# Altium PCB ui_layout-v1.2.PcbDoc
Units mil, origin at the board's own origin, x right, y up, seen from the top; angles counter-clockwise.
Board outline 3110.07 x 2131 mil, 4 copper layers (L1_Signal, L2_PWR, L3_GND, L4_Signal), stack 61.811 mil thick; 83 components, 76 nets, 296 pads, 689 vias.
Unrouted connection lines stored in the file: 90.
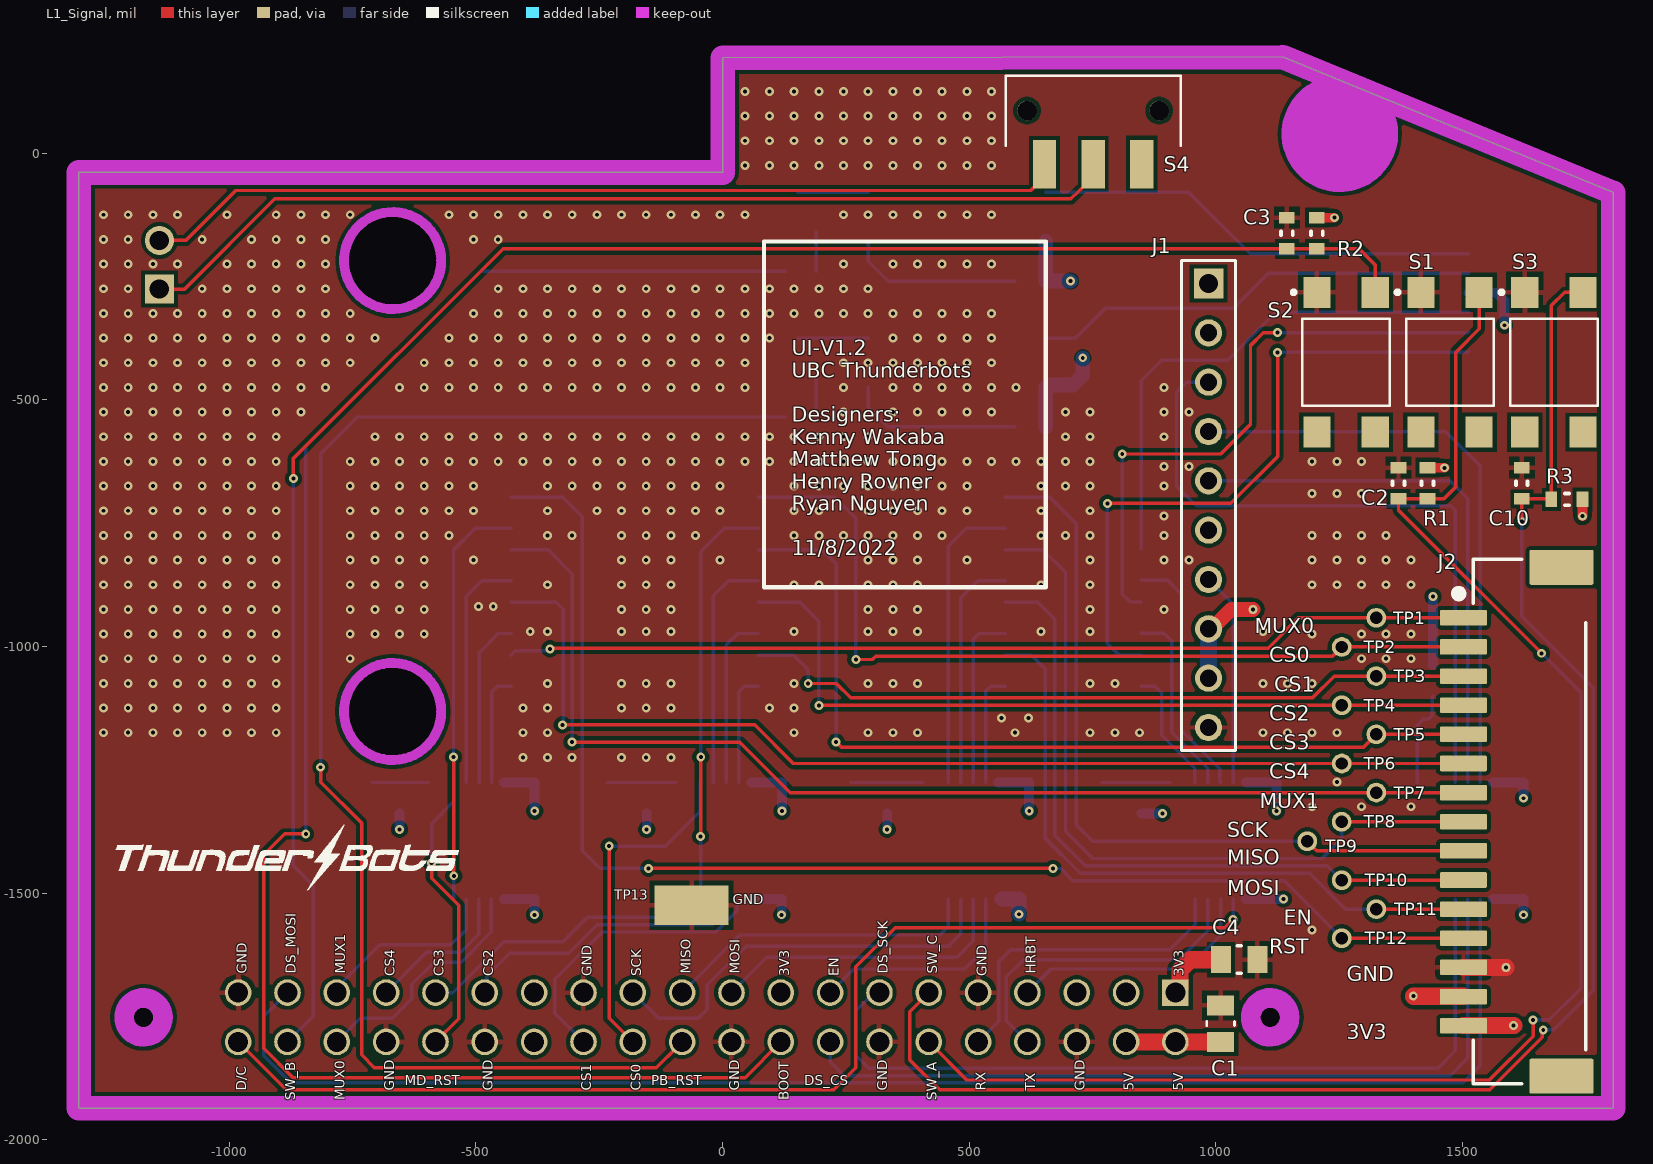
[diagram p0: L1_Signal view]
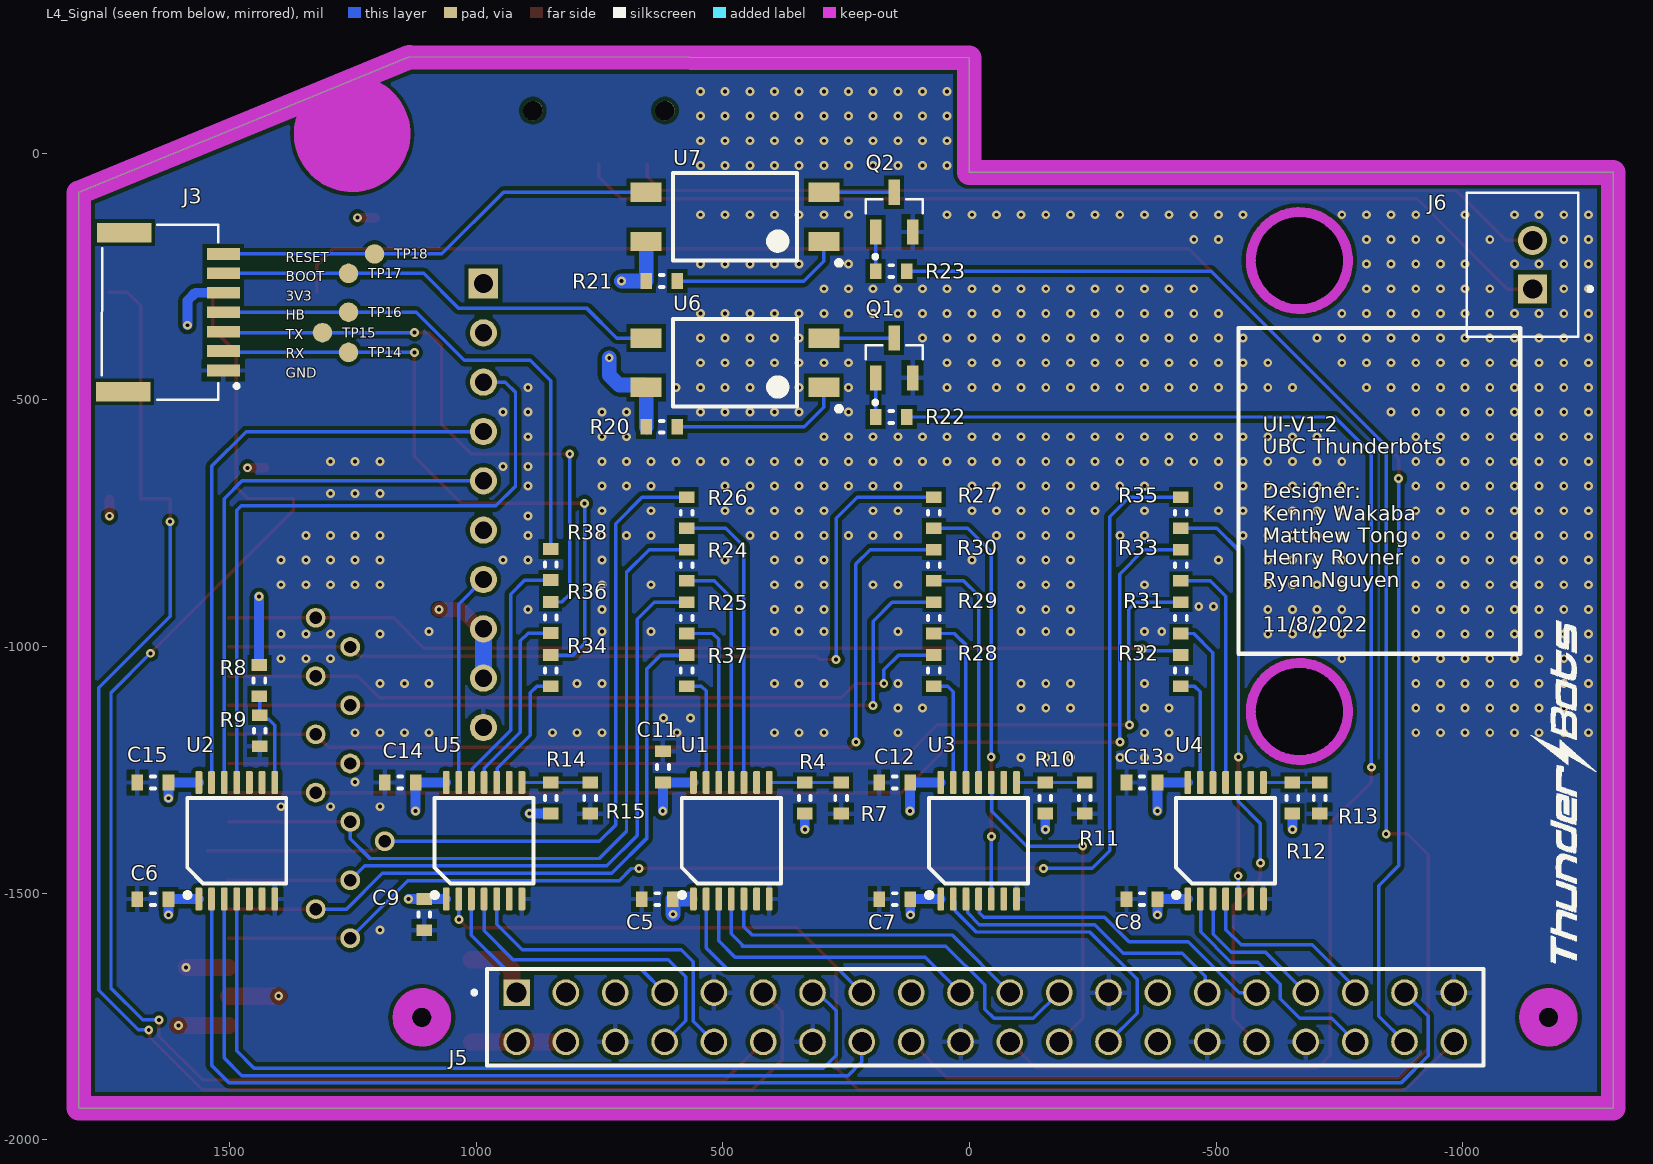
[diagram p1: L4_Signal view, seen from below]
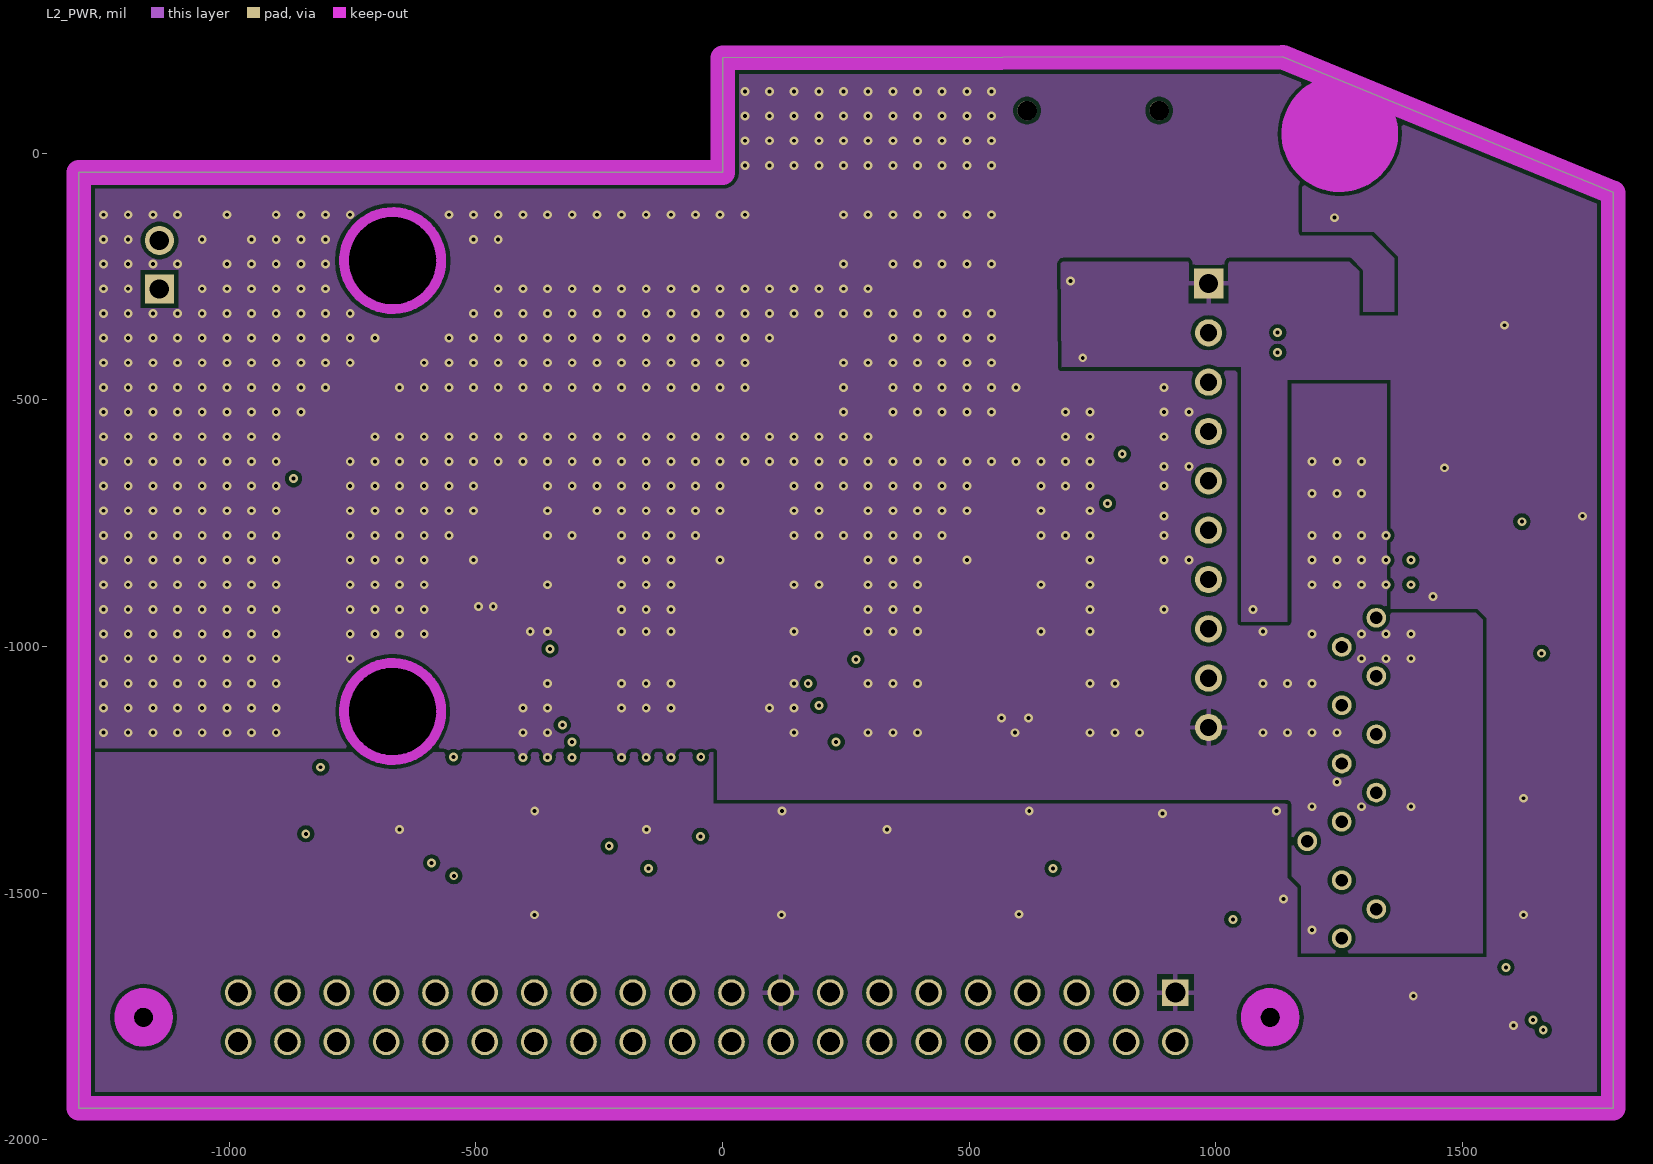
[diagram p2: L2_PWR]
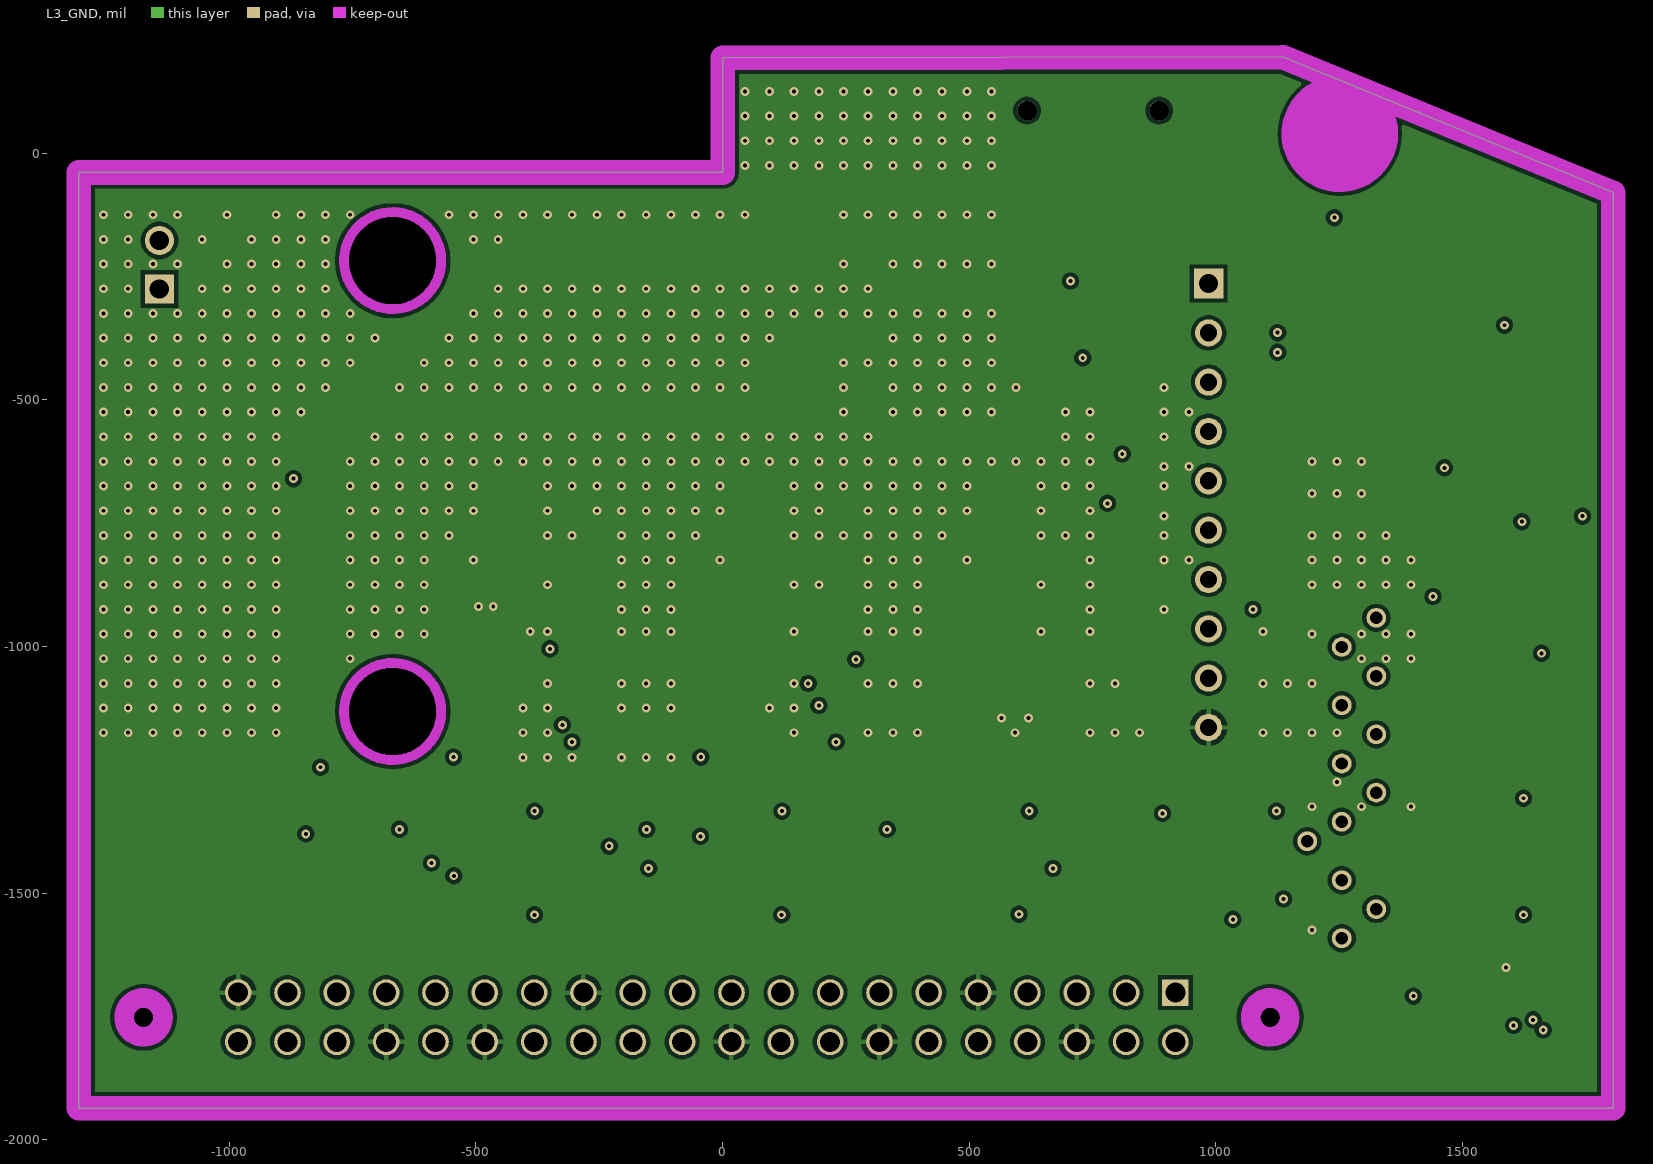
[diagram p3: L3_GND]

## Layer stack, top to bottom
Top Mask: solder mask 0.591, Solder Resist, Dk 3.8
L1_Signal: signal copper 1.378
Dielectric 1: prepreg 3.937, 2313, Dk 4.05
L2_PWR: signal copper 0.689
Core: core 49.803, FR-4, Dk 4.5
L3_GND: signal copper 0.689
Dielectric 2: prepreg 3.937, 2313, Dk 4.05
L4_Signal: signal copper 1.378
Bottom Mask: solder mask 0.591, Solder Resist, Dk 3.8

## Board outline
-1305,-1936 1805,-1936 1805,-1934 1805,-80 1805.07,-79.82 1135,195 0,193.14 0,-39.37 -1305,-39.37

## Design rules (kind name [scope] priority, off if disabled: settings)
BoardOutlineClearance [All] p1: gap=7.87 ignorepadtopadclearanceinfootprint=FALSE except(15.75: Arc-SplitBarrior Arc-SplitContinuation Track-SplitBarrior Track-SplitContinuation SMDPad-SplitBarrior SMDPad-SplitContinuation THPad-SplitBarrior THPad-SplitContinuation Via-SplitBarrior Via-SplitContinuation Fill-SplitBarrior Fill-SplitContinuation Poly-SplitBarrior Poly-SplitContinuation Region-SplitBarrior Region-SplitContinuation Text-SplitBarrior Text-SplitContinuation)
Clearance "JETSON_5V Polygon Clearance" [(InNet('JETSON_5V')) AND InPolygon] p1: gap=15 ignorepadtopadclearanceinfootprint=FALSE
Clearance "POWER_5V Polygon Clearance" [(InNet('POWER_5V')) AND InPolygon] p2: gap=20 ignorepadtopadclearanceinfootprint=TRUE
Clearance [All] p3: gap=8 ignorepadtopadclearanceinfootprint=FALSE
HoleSize [All] p1: absolutevalues=TRUE maxlimit=248.03 minlimit=7.87 maxpercent=80.000 minpercent=20.000
MinimumAnnularRing [All] p1: minimumring=3
MinimumSolderMaskSliver [All] p1: minsoldermaskwidth=3.94
PolygonConnect PolygonConnect_Vias [IsVia] p1: connectstyle=Direct reliefconductorwidth=10 reliefentries=4 polygonreliefangle="90 Angle" airgapwidth=10
PolygonConnect PolygonConnect_NoRelief [InPadClass('NoRelief')] p2: connectstyle=Direct reliefconductorwidth=20 reliefentries=4 polygonreliefangle="90 Angle" airgapwidth=10
PolygonConnect [All] p3: connectstyle=Relief reliefconductorwidth=10 reliefentries=4 polygonreliefangle="90 Angle" airgapwidth=10
RoutingCorners [All] p1: cornerstyle=Round minsetback=100 maxsetback=100
RoutingVias [All] p1: holewidth=8 width=18 viastyle="Through Hole" minholewidth=8 minwidth=18 maxholewidth=39.37 maxwidth=78.74
SilkToSilkClearance [All] p1: silktosilkclearance=3.94
SilkToSolderMaskClearance [IsPad] p1: minsilkscreentomaskgap=3.94 clearancetoexposedcopper=TRUE
SolderMaskExpansion SolderMaskExpansion_Via [IsVia] p1: expansion=4 istentingtop=TRUE
SolderMaskExpansion [All] p2: expansion=4 istentingtop=FALSE
Width [All] p1: maxlimit=100 minlimit=4 preferedwidth=7
25 further rules are at their usual default settings.

## Classes and differential pairs
net class PB: BF_HRBT BF_RX BF_TX BOOT HRBT LF_RX_PWR LF_TX_PWR NetQ1_1 NetQ1_2 NetQ2_1 NetQ2_2 NetR20_1 NetR21_1 PB_RESET SRC_BOOT SRC_HRBT SRC_RESET SRC_RX SRC_TX
net class MD: BF_CS_CTRL_0 BF_CS_CTRL_1 BF_CS_CTRL_2 BF_CS_CTRL_3 BF_CS_CTRL_4 BF_CTRL_EN BF_MISO BF_MOSI BF_MUX_SEL_0 BF_MUX_SEL_1 BF_RESET BF_SCK CS_CTRL_0 CS_CTRL_1 CS_CTRL_2 CS_CTRL_3 CS_CTRL_4 CTRL_EN LF_MISO_SRC LF_MOSI_DST LF_MUX_SEL_0_DST LF_MUX_SEL_1_DST LF_RST_DST LF_SCK_DST SRC_CS_CTRL_0 SRC_CS_CTRL_1 SRC_CS_CTRL_2 SRC_CS_CTRL_3 SRC_CS_CTRL_4 SRC_CTRL_EN SRC_MD_MISO SRC_MD_MOSI SRC_MD_RESET SRC_MD_SCK SRC_MUX_SEL_0 SRC_MUX_SEL_1 SRC_RESET
component class U_lowpass-filters: R24 R25 R26 R27 R28 R29 R30 R31 R32 R33 R34 R35 R36 R37 R38
component class U_optocoupler: Q1 Q2 R20 R21 R22 U6 U7
component class ui-pcb: ? TP13
component class U_buffers: C5 C6 C7 C8 C9 C11 C12 C13 C14 C15 R4 R7 R8 R9 R10 R11 R12 R13 R14 R15 U1 U2 U3 U4 U5
component class U_jetson-nano: C1 C4 J5
component class U_power: J3 J6 S4 TP14 TP15 TP16 TP17 TP18
component class U_motor-driver: J2 TP1 TP2 TP3 TP4 TP5 TP6 TP7 TP8 TP9 TP10 TP11 TP12
component class U_interface-switches: C2 C3 C10 R1 R2 R3 S1 S2 S3
component class U_display: J1

## Components (designator, comment, footprint, x,y, rotation, side; value= is the part's Value field where it differs from the comment)
C1 "0.10uF 25V" 0805 1009.34,-1764.76 r270 top value=0.1uF
C2 "0.10uF" 0603 1370,-669.32 r270 top
C3 "0.10uF" 0603 1143.74,-162.5 r270 top
C4 "0.10uF 25V" 0805 1047,-1635 r180 top value=0.1uF
C5 "0.10uF" 0603 632.5,-1512.11 r0 bottom
C6 "0.10uF" 0603 1655,-1512.11 r0 bottom
C7 "0.10uF" 0603 151.25,-1512.11 r0 bottom
C8 "0.10uF" 0603 -350,-1512.11 r0 bottom
C9 "0.10uF" 0603 1105,-1543.61 r270 bottom
C10 "0.10uF" 0603 1620,-669.32 r270 top
C11 "0.10uF" 0603 621,-1244.39 r90 bottom
C12 "0.10uF" 0603 151.25,-1275.89 r0 bottom
C13 "0.10uF" 0603 -350,-1275.89 r0 bottom
C14 "0.10uF" 0603 1153.75,-1275.89 r0 bottom
C15 "0.10uF" 0603 1655,-1275.89 r0 bottom
J1 "CN LCD TFT 128X160 1.8in" "CN LCD TFT 128X160 1.8in" 985,-264.37 r0 top
J2 "BM15B-ZESS-TBT(LF)(SN)" "JST ZE SMT 15POS" 1610,-1385 r90 top locked
J3 "SM07B-NSHSS-TB (LF)(SN)" JST_SM07B-NSHSS-TB_(LF)(SN) 1512.24,-440.69 r90 bottom locked
J5 "CN HDR 40POS" "CN HDR 40POS 0.1 TH" -32.17,-1751.77 r0 bottom
J6 "CN HDR 2POS JST XH" JST_B2B-XH-A(LF)(SN) -1121.06,-226.38 r90 bottom
Q1 "NPN MMSS8050" SOT95P237X112-3N 152.4,-415.35 r90 bottom
Q2 "NPN MMSS8050" SOT95P237X112-3N 152.4,-119.65 r90 bottom
R1 "10k" 0603 1428.82,-669.32 r270 top
R2 "10k" 0603 1204.69,-162.5 r270 top
R3 "10k" 0603 1711.5,-701.99 r180 top
R4 "JUMPER" 0603 333.66,-1307.39 r90 bottom value=0
R7 "JUMPER" 0603 260,-1307.39 r270 bottom value=0
R8 "JUMPER" 0603 1439.03,-1069.32 r270 bottom value=0
R9 "JUMPER" 0603 1438.29,-1170.81 r270 bottom value=0
R10 "JUMPER" 0603 -153.75,-1307.39 r90 bottom value=0
R11 "JUMPER" 0603 -233.75,-1307.39 r270 bottom value=0
R12 "JUMPER" 0603 -655,-1307.39 r90 bottom value=0
R13 "JUMPER" 0603 -710,-1307.39 r270 bottom value=0
R14 "JUMPER" 0603 848.75,-1307.39 r90 bottom value=0
R15 "JUMPER" 0603 768.75,-1307.39 r270 bottom value=0
R20 "330" 0603 623.62,-555 r0 bottom
R21 "330" 0603 623.62,-259.29 r0 bottom
R22 "39k" 0603 158.31,-535 r0 bottom
R23 "39k" 0603 158.31,-239.29 r0 bottom
R24 "JUMPER" 0603 573.09,-835.67 r270 bottom value=0
R25 "JUMPER" 0603 573.09,-942.33 r270 bottom value=0
R26 "JUMPER" 0603 573.09,-729 r270 bottom value=0
R27 "JUMPER" 0603 71.84,-729 r270 bottom value=0
R28 "JUMPER" 0603 71.84,-1049 r270 bottom value=0
R29 "JUMPER" 0603 71.84,-942.33 r270 bottom value=0
R30 "JUMPER" 0603 71.84,-835.67 r270 bottom value=0
R31 "JUMPER" 0603 -428.82,-942.33 r270 bottom value=0
R32 "JUMPER" 0603 -428.82,-1049 r270 bottom value=0
R33 "JUMPER" 0603 -428.82,-835.67 r270 bottom value=0
R34 "JUMPER" 0603 848.75,-1049 r270 bottom value=0
R35 "JUMPER" 0603 -428.82,-729 r270 bottom value=0
R36 "JUMPER" 0603 848.75,-941.5 r270 bottom value=0
R37 "JUMPER" 0603 573.09,-1049 r270 bottom value=0
R38 "JUMPER" 0603 848.75,-834 r270 bottom value=0
S1 "TL3305AF260QG" SW_TL3305AF260QG 1474.37,-424 r0 top
S2 "TL3305AF260QG" SW_TL3305AF260QG 1263.74,-424 r0 top
S3 "TL3305AF260QG" SW_TL3305AF260QG 1685,-424 r0 top
S4 "SW SLIDE SMALL" "SW SLIDE SMALL" 751,86 r180 top
TP1 "Test Point (Via)" TP 1325,-942.09 r0 top
TP2 "Test Point (Via)" TP 1255,-1001.14 r90 top
TP3 "Test Point (Via)" TP 1325,-1060.2 r90 top
TP4 "Test Point (Via)" TP 1255,-1119.25 r90 top
TP5 "Test Point (Via)" TP 1325,-1178.31 r90 top
TP6 "Test Point (Via)" TP 1255,-1237.36 r90 top
TP7 "Test Point (Via)" TP 1325,-1296.42 r90 top
TP8 "Test Point (Via)" TP 1254.72,-1355.47 r90 top
TP9 "Test Point (Via)" TP 1185,-1395 r90 top
TP10 "Test Point (Via)" TP 1255,-1474 r90 top
TP11 "Test Point (Via)" TP 1325,-1532.64 r90 top
TP12 "Test Point (Via)" TP 1255,-1591.69 r90 top
TP13 "Test Point - 5019" TP380X203 -63.04,-1524.56 r180 top
TP14 "Testpoint" TP_1mm 1258.47,-404 r90 bottom
TP15 "Testpoint" TP_1mm 1311.33,-364 r90 bottom
TP16 "Testpoint" TP_1mm 1258.47,-322.58 r90 bottom
TP17 "Testpoint" TP_1mm 1258.47,-243.84 r90 bottom
TP18 "Testpoint" TP_1mm 1205.61,-204.47 r90 bottom
U1 "TXU0304PWR" 14-TSSOP 482.5,-1394 r90 bottom
U2 "TXU0304PWR" 14-TSSOP 1485,-1394 r90 bottom
U3 "TXU0304PWR" 14-TSSOP -18.75,-1394 r90 bottom
U4 "TXU0304PWR" 14-TSSOP -519.41,-1394 r90 bottom
U5 "TXU0304PWR" 14-TSSOP 983.75,-1394 r90 bottom
U6 "APC-817D1" APC-817D1 475,-425 r0 bottom
U7 "APC-817D1" APC-817D1 475,-129.29 r0 bottom

## Footprints (in the part's own frame and the unit in brackets; to place one, negate y for a bottom-side part, rotate by r counter-clockwise, add the part's x,y. Pads: shape width x height; smd on the part's side, far side on the other; paste and mask are expansions set on the pad)
14-TSSOP [mm]
  rrect50% 1.2x0.35 smd mask+0.07: 1(-3,1.95) 2(-3,1.3) 3(-3,0.65) 4(-3,0) 5(-3,-0.65) 6(-3,-1.3) 7(-3,-1.95) 8(3,-1.95) 9(3,-1.3) 10(3,-0.65) 11(3,0) 12(3,0.65) 13(3,1.3) 14(3,1.95)
  silkscreen extent -2.8,-2.55 2.2,2.55, body extent -3.2,-2.5 3.2,2.5, height 1.13
0603 [mm] "Chip Resistor, 2-Leads, Body 1.60x0.80mm, IPC High Density"
  rect 0.6x0.8 smd mask+0.1: 1(-0.8,0) 2(0.8,0)
  silkscreen extent -0.1,-0.3 0.1,0.3, body extent -0.8,-0.4 0.8,0.4, height 0.6
0805 [mil] "40 Position Header Connector 0.100\" (2.54mm) Through Hole"
  rect 40x55 smd: 1(-37,0) 2(37,0)
  silkscreen extent -4,-28 4,28, body extent -47,-28 47,28, height 24
APC-817D1 [mm]
  rect 1.6x1 smd: 1(-4.575,1.27) 2(-4.575,-1.27) 3(4.575,-1.27) 4(4.575,1.27)
  silkscreen extent -5.47,-2.25 3.2,2.49, body extent -3.25,-2.3 3.25,2.29, height 3.5
"CN HDR 40POS 0.1 TH" [mm] "40 Position Header Connector 0.100\" (2.54mm) Through Hole"
  rect 1.37x1.37 hole 1.02: 01(24.13,-1.27)
  round 1.37 hole 1.02: 02(24.13,1.27) 03(21.59,-1.27) 04(21.59,1.27) 05(19.05,-1.27) 06(19.05,1.27) 07(16.51,-1.27) 08(16.51,1.27) 09(13.97,-1.27) 10(13.97,1.27) 11(11.43,-1.27) 12(11.43,1.27) 13(8.89,-1.27) 14(8.89,1.27) 15(6.35,-1.27) 16(6.35,1.27) 17(3.81,-1.27) 18(3.81,1.27) 19(1.27,-1.27) 20(1.27,1.27) 21(-1.27,-1.27) 22(-1.27,1.27) 23(-3.81,-1.27) 24(-3.81,1.27) 25(-6.35,-1.27) 26(-6.35,1.27) 27(-8.89,-1.27) 28(-8.89,1.27) 29(-11.43,-1.27) 30(-11.43,1.27) 31(-13.97,-1.27) 32(-13.97,1.27) 33(-16.51,-1.27) 34(-16.51,1.27) 35(-19.05,-1.27) 36(-19.05,1.27) 37(-21.59,-1.27) 38(-21.59,1.27) 39(-24.13,-1.27) 40(-24.13,1.27)
  silkscreen extent -25.66,-2.47 26.4,2.47
"CN LCD TFT 128X160 1.8in" [mil]
  rect 60x60 hole 37.99 mask+0: 1(0,0)
  round 55 hole 35 mask+0: 2(0,-100) 3(0,-200) 4(0,-300) 5(0,-400) 6(0,-500) 7(0,-600) 8(0,-700) 9(0,-800) 10(0,-900)
  silkscreen extent -55,-947 55,47, body extent -50,-955 50,45, height 90
"JST ZE SMT 15POS" [mm] "15 POS HDR JST ZE"
  rrect10% 1.8x3.3 smd: 0(-12.35,-2.3) 0(13.85,-2.3)
  rrect10% 0.8x2.4 smd: 1(11.25,2.75) 2(9.75,2.75) 3(8.25,2.75) 4(6.75,2.75) 5(5.25,2.75) 6(3.75,2.75) 7(2.25,2.75) 8(0.75,2.75) 9(-0.75,2.75) 10(-2.25,2.75) 11(-3.75,2.75) 12(-5.25,2.75) 13(-6.75,2.75) 14(-8.25,2.75) 15(-9.75,2.75)
  silkscreen extent -12.75,-3.55 14.26,3, body extent -12.75,-3.55 14.25,3.45, height 7.6
JST_B2B-XH-A(LF)(SN) [mm]
  rect 1.508x1.508 hole 1: 1(-1.25,-0.525)
  round 1.508 hole 1: 2(1.25,-0.525)
  silkscreen extent -3.7,-3.6 3.7,2.88, body extent -3.7,-2.85 3.7,2.9, height 7.1
JST_SM07B-NSHSS-TB_(LF)(SN) [mm]
  rect 0.6x1.7 smd: 1(0,0) 2(1,0) 3(2,0) 4(3,0) 5(4,0) 6(5,0) 7(6,0)
  rect 1x2.8 smd: P1(-1.1,5.15) P2(7.1,5.1)
  silkscreen extent -1.5,-0.78 7.5,6.25, body extent -1.5,-0.5 7.5,6.3, height 4.51
SOT95P237X112-3N [mm]
  rect 1.3x0.59 smd: 1(-1.025,0.95) 2(1.025,0) 3(-1.025,-0.95)
  silkscreen extent -2.39,-1.46 0.65,1.46, body extent -1.54,-1.5 1.29,1.5, height 1.2
"SW SLIDE SMALL" [mm]
  rect 1.2x2.5 smd: 1(-2.5,2.75) 2(0,2.75) 3(2.5,2.75)
  round 1 hole 1 unplated: ""(-3.4,0) ""(3.4,0)
  silkscreen extent -4.5,-1.8 4.5,1.8, body extent -4.5,-3.75 4.5,3.75, height 3.51
SW_TL3305AF260QG [mm]
  rect 1.4x1.6 smd: 1(-1.5,3.6) 2(-1.5,-3.6) 3(1.5,3.6) 4(1.5,-3.6)
  silkscreen extent -2.8,-2.25 2.25,3.7, body extent -2.25,-3.75 2.25,3.75, height 3.7
TP [mil] "Test point (40mil Standard)"
  round 40 hole 25: 1(0,0)
TP380X203 [mm]
  rect 3.8x2.03 smd: 1(0,0)
TP_1mm [mm]
  round 1 smd paste-2: 1(0,0)

## Part data
C1 C4: library part "CAP 0.10uF 25V", "CAP CER 0.10UF 25V X7R 0805", Operating Temperature="-55°C ~ 125°C", Rating=25V, Temperature Coefficient=X7R, Tolerance=10%, Part Number="CAP 0.10uF 25V"
C2 C3 C5 C6 C7 C8 C9 C10 C11 C12 C13 C14 C15: library part "CAP 0.10uF 16V", "CAP CER 0.10UF 16V X5R 0603", Operating Temperature="-55°C ~ 85°C", Package=0603/0805, Rating=16V, Temperature Coefficient=X5R, Tolerance=10%, Part Number="CAP 0.10uF 16V"
J1: "Graphic LCD Display Module Transmissive Red, Green, Blue (RGB) TFT - Color SPI 1.8\" (45.72mm) 128 x 160", Manufacturer Part Number 1=358, Supplier Part Number 1=1528-1536-ND, Part Number="CN LCD TFT 128X160 1.8in", Pin Count=10, Supplier 1=Digi-Key, Supplier URL 1=https://www.digikey.ca/en/products/detail/adafruit-industries-llc/358/5801368
J2: library part "CN 15POS JST ZE SMT", "CONN HEADER VERT SMD 15POS ZE", Supplier Part Number 1=455-4211-1-ND, Manufacturer Part Number 1=BM15B-ZESS-TBT(LF)(SN), Part Number="CN 15POS JST ZE SMT", Pin Count=15, Supplier 1=Digi-Key, Supplier URL 1=https://www.digikey.ca/en/products/detail/jst-sales-america-inc/BM15B-ZESS-TBT-LF-SN/1886999?s=N4IgTCBcDaIEIFkCMBWOBaAWgUQMq-QBU5CAKAGQDEBKU3AOWpAF0BfIA
J3: library part "CN 7POS JST NSH SMT RA", "Connector Header Surface Mount, Right Angle 7 position 0.039\" (1.00mm)", Package=None, Supplier Part Number 1=455-2771-1-ND, Availability=Unavailable, Check_prices=https://www.snapeda.com/parts/SM12B-NSHSS-TB%20(LF)(SN)/JST%20Sales%20America%20Inc./view-part/5255521/?ref=eda, MF="JST Sales America Inc.", MP="SM12B-NSHSS-TB (LF)(SN)", Part Number="CN 7POS JST NSH SMT RA", Pin Count=7, Price=None, SnapEDA_Link=https://www.snapeda.com/parts/SM12B-NSHSS-TB%20(LF)(SN)/JST%20Sales%20America%20Inc./view-part/5255521/?ref=snap, Supplier 1=Digi-Key, Supplier 2=Digi-Key, Supplier 3=Digi-Key, Supplier 4=Digi-Key, Supplier Part Number 2=455-2771-1-ND, Supplier Part Number 3=455-2771-6-ND, Supplier Part Number 4=455-2771-2-ND, Supplier URL 1=https://www.digikey.ca/en/products/detail/jst-sales-america-inc/SM07B-NSHSS-TB-LF-SN/3313637
J5: "40 Position Header Connector", Supplier Part Number 1=S6104-ND, Part Number="CN HDR 40POS", Pin Count=40, Supplier 1=Digi-Key, Supplier URL 1=https://www.digikey.ca/en/products/detail/sullins-connector-solutions/PPTC202LFBN-RC/807240?s=N4IgTCBcDaIMoDYCMAGALAWgHIBEQF0BfIA
J6: "Connector Header Through Hole 2 position 0.098 _2.50mm_ / JST XH", Package=None, MF="JST Sales", MP=B2B-XH-A_LF__SN_, Part Number="CN HDR 2POS JST XH", Pin Count=2, Price=None, SnapEDA_Link=https://www.snapeda.com/parts/B2B-XH-A%28LF%29%28SN%29/JST%20Sales%20America%20Inc./view-part/492310/?ref=snap
Q1 Q2: library part "N_BJT MMSS8050", "Bipolar (BJT) Transistor NPN 25 V 1.5 A 100MHz 625 mW Surface Mount SOT-23", Supplier Part Number 1=MMSS8050-H-TPMSTR-ND, Part Number="N_BJT MMSS8050", Supplier 1=Digi-Key, Supplier URL 1=https://www.digikey.ca/en/products/detail/micro-commercial-co/MMSS8050-H-TP/2696476
R1 R2 R3: library part "RES 10k 1/8W - 5%", "RES SMD 10K OHM 5% 1/8W 0805", Package=0805, Power (Watts)=0.125W, Tolerance=5%, Part Number="RES 10k 1/8W - 5%"
R4 R7 R8 R9 R10 R11 R12 R13 R14 R15 R24 R25 R26 R27 R28 R29 R30 R31 R32 R33 R34 R35 R36 R37 R38: library part "RES 0 JUMPER", "RES SMD 0 OHM JUMPER GENERIC 0603", Manufacturer Part Number 1=RK73Z1JTTD, Package=0805, Supplier Part Number 1=2019-RK73Z1JTTDCT-ND, Tolerance=N/A, Part Number="RES 0 JUMPER", Supplier 1=Digi-Key, Supplier URL 1=https://www.digikey.ca/en/products/detail/koa-speer-electronics-inc/RK73Z1JTTD/9845478
R20 R21: library part "RES 330.0 1/8W - 5%", "Default Resistor Symbol", Manufacturer Part Number 1=RMCF0603JT330R, Package=0805, Power (Watts)=0.125W, Supplier Part Number 1=RMCF0603JT330RCT-ND, Tolerance=5%, Part Number="RES 330.0 1/8W - 5%", Supplier 1=Digi-Key, Supplier URL 1=https://www.digikey.ca/en/products/detail/stackpole-electronics-inc/RMCF0603JT330R/1757998
R22 R23: library part "RES 39k 1/8W", "Default Resistor Symbol", Manufacturer Part Number 1=CRGCQ0603F39K, Manufacturer Part Number 2=CRG0805F39K, Package=0805, Power (Watts)=0.125W, Supplier Part Number 1=A129707CT-ND, Tolerance=1%, Part Number="RES 39k 1/8W", Supplier 1=Digi-Key, Supplier 2=Digi-Key, Supplier Part Number 2=A126366CT-ND, Supplier URL 1=https://www.digikey.ca/en/products/detail/te-connectivity-passive-product/CRGCQ0603F39K/8576309?s=N4IgTCBcDaIIIEYwE4DsAGVBhAKiAugL5A, Supplier URL 2=https://www.digikey.ca/en/products/detail/te-connectivity-passive-product/CRG0805F39K/2380898?s=N4IgTCBcDaIIIEYwDYDMzkGEAqIC6AvkA, Tolerance 2=1%
S1 S2 S3: library part "SW PUSH SMD", "Tactile Switch SPST-NO Top Actuated Surface Mount", Package="LQFP-48 E-Switch", Supplier Part Number 1=EG5353CT-ND, Availability=Unavailable, Manufacturer Part Number 1=TL3305AF260QG, MF=E-Switch, MP=TL3305AF260QG, Part Number="SW PUSH SMD", Price=None, SnapEDA_Link=https://www.snapeda.com/parts/TL3305AF260QG/E-Switch/view-part/479903/?ref=snap, Supplier 1=Digi-key, Supplier URL 1=https://www.digikey.com/en/products/detail/e-switch/TL3305AF260QG/5816184
S4: "Slide Switch SPDT Surface Mount, Right Angle", Manufacturer Part Number 1="JS102011SAQN SPDT", Package=None, Availability=Unavailable, MF=C&K, MP=JS102011SAQN, Part Number="SW SLIDE SMALL", Price=None, SnapEDA_Link=https://www.snapeda.com/parts/JS102011SAQN/C%26K/view-part/214325/?ref=snap, Supplier 1=Digi-key, Supplier Part Number 1="JS102011SAQN SPDT", Supplier URL 1=https://www.digikey.ca/en/products/detail/c-k/JS102011SAQN/1640095
TP13: "PC Test Point, Miniature Phosphor Bronze, Silver Plating Surface Mount Mounting Type", Package="2010 Keystone", MF="Keystone Electronics", MP=5019, Part Number="Test Point - 5019"
TP14 TP15 TP16 TP17 TP18: library part TP_1MM, Part Number=TP_1MM
U1 U2 U3 U4 U5: library part TXU0304, "4-Bit Fixed Direction Voltage-Level Translator with Schmitt-Trigger Inputs  and 3-State Outputs", Mfr_Name="Texas Instruments", Supplier Part Number 1=296-TXU0304PWRTR-ND, Copyright="Copyright (C) 2022 Ultra Librarian. All rights reserved.", Digi-Key_Part_Number_1=296-TXU0304PWRTR-ND, Digi-Key_Part_Number_2=296-TXU0304PWRCT-ND, Digi-Key_Part_Number_3=296-TXU0304PWRDKR-ND, Manufacturer_Part_Number=TXU0304PWR, Part Number=TXU0304, RefDes=RefDes, Supplier 1=Digi-Key, Supplier URL 1=https://www.digikey.ca/en/products/detail/texas-instruments/TXU0304PWR/14641423, Type=DEV
U6 U7: "DIP4, DC Input, Optocoupler", Supplier Part Number 1=2007-APC-817D1-SLCT-ND, Part Number=APC-817D1, Supplier 1=Digi-Key, Supplier URL 1=https://www.digikey.ca/en/products/detail/american-bright-optoelectronics-corporation/APC-817D1-SL/16273156
TP1 TP2 TP3 TP4 TP5 TP6 TP7 TP8 TP9 TP10 TP11 TP12: Part Number="Test Point (Via)"

## Free pads (board coordinates)
  round 60 hole 78.74 unplated: 1(-1174,-1752) 1(1110,-1752)
  round 60 hole 196.85 unplated: 1(-669,-1132) 1(-669,-218)
  oct 60x60 hole 118.11 unplated: 1(1251,39)

## Via types
v1: diameter 18, hole 8, L1_Signal to L4_Signal, tented both sides, 689 vias

## Nets (pads, with @x,y where several pads share a name; then routed paths per layer and width w, separated by ;. In a path a pad name is that pad's centre, name@x,y a point inside that pad or via, vN(x,y) a via of type N, cw(c..) or ccw(c..) an arc to the next point about the centre after c; other vN are vias at no path point)
BF_CS_CTRL_0: R27.2 U3.5 | length 840.3
  L1_Signal w7: v1(-45,-1385) -44.67,-1384.67 -44.67,-1224.92 v1(-44.34,-1224.59)
  L4_Signal w7: v1(-45,-1385) -44.67,-1385.33 -44.67,-1511.78 U3.5 ; v1(-44.34,-1224.59) -44.34,-808.34 3.5,-760.5 R27.2
BF_CS_CTRL_1: R28.2 U3.13 | length 228.3
  L4_Signal w7: U3.13 32.43,-1091.57 43.5,-1080.5 R28.2
BF_CS_CTRL_2: R29.2 U3.12 | length 353.3
  L4_Signal w7: U3.12 6.84,-997.25 30.26,-973.83 R29.2
BF_CS_CTRL_3: R30.2 U3.11 | length 481.4
  L4_Signal w7: U3.11 -18.75,-897.75 11.84,-867.16 R30.2
BF_CS_CTRL_4: R31.2 U4.12 | length 344.2
  L4_Signal w7: U4.12 -493.82,-1012.82 -454.83,-973.83 R31.2
BF_CTRL_EN: R37.2 U1.13 | length 229
  L4_Signal w7: U1.13 533.68,-1090.32 543.5,-1080.5 R37.2
BF_D/C_DS: J1.7 U5.13 | length 432.2
  L4_Signal w7: J1.7 1034.93,-914.3 U5.13
BF_HRBT: R38.2 U5.12 | length 507.8
  L4_Signal w7: R38.2 901.5,-865.5 930,-894 930,-1170 1007.94,-1247.94 1007.94,-1274.49 U5.12
BF_MISO: R26.2 U1.10 | length 610.1
  L4_Signal w7: U1.10 456.91,-797.09 493.5,-760.5 R26.2
BF_MOSI: R25.2 U1.12 | length 360.1
  L4_Signal w7: U1.12 508.09,-985.75 520.01,-973.83 R25.2
BF_MOSI_DS: J1.4 U2.13 | length 1221
  L4_Signal w7: J1.4@985,-565 1466,-565 1536.18,-635.18 U2.13
BF_MUX_SEL_0: R32.2 U4.13 | length 227.9
  L4_Signal w7: U4.13 -468.23,-1092.23 -456.5,-1080.5 R32.2
BF_MUX_SEL_1: R33.2 U4.11 | length 481
  L4_Signal w7: U4.11 -519.41,-898.41 -488.16,-867.16 R33.2
BF_RESET: R35.2 U4.5 | length 843
  L1_Signal w7: v1(-545.59,-1224.59) -545.3,-1224.89 -545.3,-1464.7 v1(-545,-1465)
  L4_Signal w7: U4.5@-545.59,-1512.11 -545,-1511.52 v1(-545,-1465) ; v1(-545.59,-1224.59) -545.59,-804.59 -501.5,-760.5 R35.2
BF_RX: R34.2 U5.10 | length 257
  L4_Signal w7: R34.2 876.5,-1080.5 890,-1094 890,-1180 957.35,-1247.35 957.35,-1275.08 U5.10
BF_SCK: R24.2 U1.11 | length 479.2
  L4_Signal w7: U1.11 482.5,-901.5 516.84,-867.16 R24.2
BF_SCK_DS: J1.3 U2.11 | length 1424.3
  L4_Signal w7: J1.3@1008.59,-464.37 940.63,-464.37 920,-485 920,-675 960,-715 1476,-715 1485,-724 U2.11
BF_TFT_CS_DS: J1.5 U2.12 | length 1115.9
  L4_Signal w7: J1.5 1474.37,-664.37 1510.59,-700.59 U2.12
BF_TX: R36.2 U5.11 | length 385.4
  L4_Signal w7: R36.2 894.17,-973 910,-988.83 910,-1173.65 983.33,-1246.97 983.33,-1275.47 U5.11
BOOT: J3.7 TP18.1 U7.3 | length 909
  L4_Signal w7: U7.3 944.29,-79.29 1069.47,-204.47 J3.7
CS_CTRL_0: J2.2 R27.1 TP2.1 | length 1744.6
  L1_Signal w7: v1(270,-1026.55) 303.45,-1026.55 310,-1020 1236.14,-1020 TP2.1 J2.2
  L4_Signal w7: R27.1 227.5,-697.5 270,-740 v1(270,-1026.55)
CS_CTRL_1: J2.3 R28.1 TP3.1 | length 1500.3
  L1_Signal w7: v1(173.45,-1075.2) 230.2,-1075.2 259.25,-1104.25 1195.75,-1104.25 1239.8,-1060.2 1316.07,-1060.2 TP3.1 J2.3
  L4_Signal w7: R28.1 143.5,-1017.5 173.45,-1047.45 v1(173.45,-1075.2)
CS_CTRL_2: J2.4 R29.1 TP4.1 | length 1617
  L1_Signal w7: v1(195,-1120) 195.37,-1119.63 1254.63,-1119.63 TP4.1 J2.4
  L4_Signal w7: R29.1 156.84,-910.84 195,-949 v1(195,-1120)
CS_CTRL_3: J2.5 R30.1 TP5.1 | length 1817.6
  L1_Signal w7: v1(230,-1194) 230.6,-1194 240.6,-1204 1299.31,-1204 TP5.1 J2.5
  L4_Signal w7: R30.1 201.17,-804.17 230,-833 v1(230,-1194)
CS_CTRL_4: J2.6 R31.1 TP6.1 | length 2205.3
  L1_Signal w7: v1(-325,-1159) 65,-1159 143.36,-1237.36 J2.6
  L4_Signal w7: R31.1 -337.16,-910.84 -323.5,-924.5 -323.5,-1157.5 v1(-325,-1159)
CTRL_EN: J2.11 R37.1 TP11.1 | length 1342.9
  L1_Signal w7: TP11.1 J2.11
  L4_Signal w7: R37.1 625.5,-1017.5 653.5,-1045.5 653.5,-1388.5 725,-1460 1190,-1460 1262.64,-1532.64 TP11.1
HRBT: J3.4 R38.1 TP16.1 | length 1062.2
  L4_Signal w7: R38.1 848.75,-461.25 890,-420 1024,-420 1121.42,-322.58 TP16.1 J3.4
JETSON_3V3: C4.2 C5.1 C6.1 C7.1 C8.1 C9.1 C11.1 C12.1 C13.1 C14.1 C15.1 J1.1 J1.8 J1.9 J2.14 J2.15 J3.5 J5.01 J5.17 R1.1 R2.1 R3.1 R4.1 R8.1 R10.1 R12.1 R14.1 R20.2 R21.2 U1.1 U1.14 U2.1 U2.14 U3.1 U3.14 U4.1 U4.14 U5.1 U5.14 U6.4 U7.4 | length 2389.6
  L1_Signal w20: R2.1 v1@1238.99,-131.01 ; R1.1 1428.91,-637.91 1462.91,-637.91 v1(1463,-638) ; v1(1742.9,-736.08) 1742.99,-735.99 R3.1 R3.1@1743.08,-701.9
  L1_Signal w30: J1.8 991.76,-964.37 1031.14,-925 v1(1075,-925)
  L1_Signal w35: J5.01 919.2,-1700.41 918.75,-1699.96 919.42,-1699.29 918.75,-1698.61 920,-1697.36 922.25,-1697.36 927.3,-1692.3 927.3,-1655.5 947.81,-1635 C4.2 ; v1@1400.4,-1709.4 J2.14@1501.33,-1709.4 ; J2.15@1502.54,-1768.72 v1(1603.46,-1768.72)
  L4_Signal w20: v1@-655,-1370.75 R12.1 ; U4.1@-443.23,-1512.11 U4.1 C8.1 v1@-381.5,-1543.98 ; U4.14@-443.23,-1275.89 U4.14 C13.1 -381.25,-1276.14 -381.25,-1333.75 v1(-381,-1334) ; v1(-154,-1371) -153.88,-1370.88 -153.88,-1339.01 R10.1 ; U3.1 C7.1 ; U3.14 C12.1 ; v1@119.75,-1543.98 C7.1 ; C7.1@119.88,-1512.23 C7.1 ; C12.1@120,-1276.14 120,-1333.75 v1(120.25,-1334) ; v1@333.66,-1370.75 R4.1 ; U1.14 C11.1 ; C11.1@621.25,-1276.14 621.25,-1333.75 v1(621.5,-1334) ; R14.1 849.19,-1338.44 v1(891.56,-1338.44) ; U5.1 C9.1 v1@1136.87,-1512.11 ; U5.14 C14.1 C14.1@1122.5,-1276.14 ; v1(1122.75,-1334) 1122.5,-1333.75 C14.1@1122.5,-1276.14 ; C14.1@1123.63,-1277.26 C14.1@1122.5,-1276.14 ; R8.1 1440,-1036.85 v1(1440,-899) ; J3.5 1569.21,-283.21 1585,-299 v1(1585,-349) ; U2.1 C6.1 v1@1623.5,-1543.98 ; U2.14 C15.1 v1@1623.5,-1307.76
  L4_Signal w30: 566.16,-1512.11 C5.1 600.94,-1512.17 v1(600.94,-1542.98) ; R20.2 U6.4 659.8,-470.31 709.69,-470.31 730,-450 v1(730,-415) ; U7.4 R21.2 v1(705,-259.29)
  L4_Signal w35: J1.9@985,-1064.01 J1.8
  other v1: 1400,-1709 -381.62,-1544.1 119.63,-1544.1 1623.38,-1544.1 1136.99,-1512.24 -655.12,-1370.88 333.53,-1370.88 1623.38,-1307.88 1240,-131.01
JETSON_5V: C1.2 J5.02 J5.04 | length 191.5
  L1_Signal w35: J5.04 J5.02 C1.2
JETSON_GND: C1.1 C2.1 C3.1 C4.1 C5.2 C6.2 C7.2 C8.2 C9.2 C10.1 C11.2 C12.2 C13.2 C14.2 C15.2 J1.10 J2.13 J3.1 J5.06 J5.09 J5.14 J5.20 J5.25 J5.30 J5.34 J5.39 Q1.3 Q2.3 R7.2 R9.2 R11.2 R13.2 R15.2 S1.1 S2.1 S3.1 TP13.1 U1.7 U2.7 U3.7 U4.7 U5.7 | length 86
  L1_Signal w35: J2.13 v1(1587.73,-1650.75)
  other v1: 1195,-1575 1195,-1325 1295,-1325 1395,-1325 1245,-1275 -405,-1225 -355,-1225 -305.5,-1225 -205,-1225 -155,-1225 -105,-1225 -1255,-1175 -1205,-1175 -1155,-1175 -1105,-1175 -1055,-1175 -1005,-1175 -955,-1175 -905,-1175 -405,-1175 -355,-1175 145,-1175 295,-1175 345,-1175 395,-1175 592.5,-1175 745,-1175 795,-1175 845,-1175 1095,-1175 1145,-1175 1195,-1175 1245,-1175 565,-1145 620,-1145 -1255,-1125 -1205,-1125 -1155,-1125 -1105,-1125 -1055,-1125 -1005,-1125 -955,-1125 -905,-1125 -405,-1125 -355,-1125 -205,-1125 -155,-1125 -105,-1125 95,-1125 145,-1125 -1255,-1075 -1205,-1075 -1155,-1075 -1105,-1075 -1055,-1075 -1005,-1075 -955,-1075 -905,-1075 -355,-1075 -205,-1075 -155,-1075 -105,-1075 145,-1075 295,-1075 345,-1075 395,-1075 745,-1075 795,-1075 1095,-1075 1145,-1075 1195,-1075 -1255,-1025 -1205,-1025 -1155,-1025 -1105,-1025 -1055,-1025 -1005,-1025 -955,-1025 -905,-1025 -755,-1025 1295,-1025 1345,-1025 1395,-1025 -1255,-975 -1205,-975 -1155,-975 -1105,-975 -1055,-975 -1005,-975 -955,-975 -905,-975 -755,-975 -705,-975 -655,-975 -605,-975 1195,-975 1295,-975 1345,-975 1395,-975 -390,-969.5 -355,-969.5 -205,-969.5 -155,-969.5 -105,-969.5 145,-969.5 295,-969.5 345,-969.5 395,-969.5 645,-969.5 745,-969.5 1095,-969.5 -1255,-925 -1205,-925 -1155,-925 -1105,-925 -1055,-925 -1005,-925 -955,-925 -905,-925 -755,-925 -705,-925 -655,-925 -605,-925 -205,-925 -155,-925 -105,-925 295,-925 345,-925 395,-925 745,-925 895,-925 -495,-919.5 -465,-919.5 -1255,-875 -1205,-875 -1155,-875 -1105,-875 -1055,-875 -1005,-875 -955,-875 -905,-875 -755,-875 -705,-875 -655,-875 -605,-875 -355,-875 -205,-875 -155,-875 -105,-875 145,-875 195,-875 295,-875 345,-875 395,-875 645,-875 745,-875 1195,-875 1245,-875 1295,-875 1345,-875 1395,-875 -1255,-825 -1205,-825 -1155,-825 -1105,-825 -1055,-825 -1005,-825 -955,-825 -905,-825 -755,-825 -705,-825 -655,-825 -605,-825 -505,-825 -205,-825 -155,-825 -105,-825 -5,-825 295,-825 345,-825 395,-825 495,-825 745,-825 895,-825 945,-825 1195,-825 1245,-825 1295,-825 1345,-825 1395,-825 -1255,-775 -1205,-775 -1155,-775 -1105,-775 -1055,-775 -1005,-775 -955,-775 -905,-775 -755,-775 -705,-775 -655,-775 -605,-775 -555,-775 -355,-775 -305.5,-775 -205,-775 -155,-775 -105,-775 -55,-775 145,-775 195,-775 245,-775 295,-775 345,-775 395,-775 445,-775 645,-775 695,-775 745,-775 895,-775 1195,-775 1245,-775 1295,-775 1345,-775 895,-735.5 -1255,-725 -1205,-725 -1155,-725 -1105,-725 -1055,-725 -1005,-725 -955,-725 -905,-725 -755,-725 -705,-725 -655,-725 -605,-725 -555,-725 -505,-725 -355,-725 -255,-725 -205,-725 -155,-725 -105,-725 -55,-725 -5,-725 145,-725 195,-725 295,-725 345,-725 395,-725 445,-725 495,-725 645,-725 745,-725 1195,-690 1245,-690 1295,-690 -1255,-675 -1205,-675 -1155,-675 -1105,-675 -1055,-675 -1005,-675 -955,-675 -905,-675 -755,-675 -705,-675 -655,-675 -605,-675 -555,-675 -505,-675 -355,-675 -305,-675 -255,-675 -205,-675 -155,-675 -105,-675 -55,-675 -5,-675 145,-675 195,-675 245,-675 295,-675 345,-675 395,-675 445,-675 495,-675 645,-675 695,-675 745,-675 895,-675 895,-635.5 945,-635.5 -1255,-625 -1205,-625 -1155,-625 -1105,-625 -1055,-625 -1005,-625 -955,-625 -905,-625 -755,-625 -705,-625 -655,-625 -605,-625 -555,-625 -505,-625 -455,-625 -405,-625 -355,-625 -305,-625 -255,-625 -205,-625 -155,-625 -105,-625 -55,-625 -5,-625 45,-625 95,-625 145,-625 195,-625 245,-625 295,-625 345,-625 395,-625 445,-625 495,-625 545,-625 595,-625 645,-625 695,-625 745,-625 1195,-625 1245,-625 1295,-625 -1255,-575 -1205,-575 -1155,-575 -1105,-575 -1055,-575 -1005,-575 -955,-575 -905,-575 -705,-575 -655,-575 -605,-575 -555,-575 -505,-575 -455,-575 -405,-575 -355,-575 -305,-575 -255,-575 -205,-575 -155,-575 -105,-575 -55,-575 -5,-575 45,-575 95,-575 145,-575 195,-575 245,-575 295,-575 695,-575 745,-575 895,-575 -1255,-525 -1205,-525 -1155,-525 -1105,-525 -1055,-525 -1005,-525 -955,-525 -905,-525 -855,-525 245,-525 345,-525 395,-525 445,-525 495,-525 545,-525 695,-525 745,-525 895,-525 945,-525 -1255,-475 -1205,-475 -1155,-475 -1105,-475 -1055,-475 -1005,-475 -955,-475 -905,-475 -855,-475 -805,-475 -655,-475 -605,-475 -555,-475 -505,-475 -455,-475 -405,-475 -355,-475 -305,-475 -255,-475 -205,-475 -155,-475 -105,-475 -55,-475 -5,-475 45,-475 245,-475 345,-475 395,-475 445,-475 495,-475 545,-475 595,-475 895,-475 -1255,-425 -1205,-425 -1155,-425 -1105,-425 -1055,-425 -1005,-425 -955,-425 -905,-425 -855,-425 -805,-425 -755,-425 -605,-425 -555,-425 -505,-425 -455,-425 -405,-425 -355,-425 -305,-425 -255,-425 -205,-425 -155,-425 -105,-425 -55,-425 -5,-425 45,-425 245,-425 295,-425 345,-425 395,-425 445,-425 495,-425 545,-425 -1255,-375 -1205,-375 -1155,-375 -1105,-375 -1055,-375 -1005,-375 -955,-375 -905,-375 -855,-375 -805,-375 -755,-375 -705,-375 -555,-375 -505,-375 -455,-375 -405,-375 -355,-375 -305,-375 -255,-375 -205,-375 -155,-375 -105,-375 -55,-375 -5,-375 45,-375 95,-375 345,-375 395,-375 445,-375 495,-375 545,-375 -1255,-325 -1205,-325 -1155,-325 -1105,-325 -1055,-325 -1005,-325 -955,-325 -905,-325 -855,-325 -805,-325 -755,-325 -505,-325 -455,-325 -405,-325 -355,-325 -305,-325 -255,-325 -205,-325 -155,-325 -105,-325 -55,-325 -5,-325 45,-325 95,-325 145,-325 195,-325 245,-325 295,-325 345,-325 395,-325 445,-325 495,-325 545,-325 -1255,-275 -1205,-275 -1055,-275 -1005,-275 -955,-275 -905,-275 -855,-275 -805,-275 -455,-275 -405,-275 -355,-275 -305,-275 -255,-275 -205,-275 -155,-275 -105,-275 -55,-275 -5,-275 45,-275 95,-275 145,-275 195,-275 245,-275 295,-275 -1255,-225 -1205,-225 -1155,-225 -1105,-225 -1005,-225 -955,-225 -905,-225 -855,-225 -805,-225 245,-225 345,-225 395,-225 445,-225 495,-225 545,-225 -1255,-175 -1205,-175 -1055,-175 -955,-175 -905,-175 -855,-175 -805,-175 -505,-175 -455,-175 -1255,-125 -1205,-125 -1155,-125 -1105,-125 -1005,-125 -905,-125 -855,-125 -805,-125 -755,-125 -555,-125 -505,-125 -455,-125 -405,-125 -355,-125 -305,-125 -255,-125 -205,-125 -155,-125 -105,-125 -55,-125 -5,-125 45,-125 245,-125 295,-125 345,-125 395,-125 445,-125 495,-125 545,-125 45,-25 95,-25 145,-25 195,-25 245,-25 295,-25 345,-25 395,-25 445,-25 495,-25 545,-25 45,25 95,25 145,25 195,25 245,25 295,25 345,25 395,25 445,25 495,25 545,25 45,75 95,75 145,75 195,75 245,75 295,75 345,75 395,75 445,75 495,75 545,75 45,125 95,125 145,125 195,125 245,125 295,125 345,125 395,125 445,125 495,125 545,125
LF_MISO_SRC: J2.9 R26.1 TP9.1 | length 1627.1
  L1_Signal w7: TP9.1 1204.53,-1414.53 J2.9 J2.9@1545.31,-1414.53
  L4_Signal w7: R26.1 663.5,-697.5 717,-751 717,-1362 750,-1395 TP9.1
LF_MOSI_DST: J2.10 R25.1 TP10.1 | length 1420.5
  L1_Signal w7: TP10.1 J2.10@1503.7,-1474
  L4_Signal w7: R25.1 638.84,-910.84 673.38,-945.38 673.38,-1383.38 735,-1445 1226,-1445 TP10.1
LF_MUX_SEL_0_DST: J2.1 R32.1 TP1.1 | length 1961.8
  L1_Signal w7: v1(-350,-1005) -348.37,-1003.37 1105.63,-1003.37 1166.91,-942.09 TP1.1 J2.1
  L4_Signal w7: R32.1 -420.51,-1009.19 -357.17,-1009.19 -352.98,-1005 v1(-350,-1005)
LF_MUX_SEL_1_DST: J2.7 R33.1 TP7.1 | length 2335.3
  L1_Signal w7: v1(-305.5,-1194) 35,-1194 137.42,-1296.42 J2.7
  L4_Signal w7: R33.1 -353.83,-804.17 -304.5,-853.5 -304.5,-1193 v1(-305.5,-1194)
LF_RST_DST: J2.12 R35.1 TP12.1 | length 2697.5
  L1_Signal w7: v1(-150,-1450) -149.88,-1450.12 669.63,-1450.12 v1(669.75,-1450.25) ; TP12.1 J2.12
  L4_Signal w7: R35.1 -324.5,-697.5 -285,-737 -285,-1414 -249,-1450 v1(-150,-1450) ; v1(669.75,-1450.25) 685.25,-1450.25 710,-1475 1138.31,-1475 TP12.1
LF_RX_PWR: J3.2 R34.1 TP14.1 | length 1346.2
  L1_Signal w7: v1(780,-710) 1030,-710 1125,-615 v1(1125,-404)
  L4_Signal w7: v1(780,-710) 780,-994 803.5,-1017.5 R34.1 ; v1(1125,-404) TP14.1 1509.57,-404 J3.2
LF_SCK_DST: J2.8 R24.1 TP8.1 | length 1546.7
  L1_Signal w7: TP8.1 J2.8
  L4_Signal w7: R24.1 649.17,-804.17 695,-850 695,-1375 750,-1430 1215,-1430 1254.72,-1390.28 TP8.1
LF_TX_PWR: J3.3 R36.1 TP15.1 | length 1228.1
  L1_Signal w7: v1(810,-610) 1010,-610 1070,-550 1070,-390 1096,-364 v1(1125,-364)
  L4_Signal w7: v1(810,-610) 810,-894 826,-910 R36.1 ; v1(1125,-364) TP15.1 1510.2,-364 J3.3
NetQ1_1: Q1.1 R22.2 | length 79.3
  L4_Signal w7: R22.2 Q1.1
NetQ1_2: Q1.2 U6.2 | length 142.5
  L4_Signal w7: Q1.2 U6.2
NetQ2_1: Q2.1 R23.2 | length 79.3
  L4_Signal w7: R23.2 Q2.1
NetQ2_2: Q2.2 U7.2 | length 142.5
  L4_Signal w7: Q2.2 U7.2
NetR4_2: R4.2 R7.1 U1.8 | length 145.7
  L4_Signal w7: R7.1 R4.2 U1.8
NetR8_2: R8.2 R9.1 U2.8 | length 193.6
  L4_Signal w7: U2.8 1408.23,-1159.57 1420.17,-1147.63 1429.97,-1147.63 R9.1 1438.29,-1101.56 R8.2
NetR10_2: R10.2 R11.1 U3.8 | length 138.2
  L4_Signal w7: R11.1 R10.2 U3.8
NetR12_2: R12.2 R13.1 U4.8 | length 113.2
  L4_Signal w7: R13.1 R12.2 U4.8@-596.77,-1275.89
NetR14_2: R14.2 R15.1 U5.8 | length 138.2
  L4_Signal w7: R15.1 R14.2 U5.8
NetR20_1: R20.1 U6.1 | length 353.7
  L4_Signal w7: U6.1 294.88,-514.88 335,-555 R20.1
NetR21_1: R21.1 U7.1 | length 354
  L4_Signal w7: U7.1 294.88,-219.17 335.71,-260 R21.1@592.13,-260
PB_PGND: J6.2 S4.3 | length 1873.5
  L1_Signal w7: J6.2 -1088.17,-177.17 -986.87,-75.87 624.56,-75.87 652.57,-47.86 S4.3
PB_RESET: J3.6 TP17.1 U6.3 | length 911.5
  L4_Signal w7: U6.3 715,-375 775,-315 1035,-315 1106.16,-243.84 TP17.1 J3.6
PWR_ON: J6.1 S4.2 | length 2012.7
  L1_Signal w7: J6.1 -1090.59,-275.59 -908,-93 705.86,-93 720.87,-77.99 751,-47.86 S4.2
SRC_BOOT: J5.18 R23.1 | length 3502.3
  L1_Signal w7: v1(-845,-1380) -888.01,-1380 -930,-1421.99 -930,-1815 -871,-1874 45.61,-1874 J5.18
  L4_Signal w7: v1(-845,-1380) -845,-594 -490.29,-239.29 R23.1
SRC_CS_CTRL_0: J5.24 U3.10 | length 689.3
  L1_Signal w7: v1(-230,-1405) -230,-1753.94 J5.24
  L4_Signal w7: v1(-230,-1405) -116.05,-1405 -45,-1333.95 -45,-1276.55 U3.10
SRC_CS_CTRL_1: J5.26 U3.2 | length 602.6
  L4_Signal w7: J5.26 -340,-1743.94 -340,-1675 -244,-1579 -14,-1579 29.04,-1535.96 29.04,-1515.5 U3.2
SRC_CS_CTRL_2: J5.29 U3.3 | length 599.5
  L4_Signal w7: J5.29 -478.4,-1698.01 -478.4,-1668.4 -431.65,-1621.65 -311.65,-1621.65 -254,-1564 -20.21,-1564 3.45,-1540.34 3.45,-1515.5 U3.3
SRC_CS_CTRL_3: J5.31 U3.4 | length 657.6
  L4_Signal w7: J5.31 -546.77,-1701.77 -443.69,-1598.69 -323.69,-1598.69 -274,-1549 -29,-1549 -20.1,-1540.1 -20.1,-1513.46 U3.4
SRC_CS_CTRL_4: J5.33 U4.3 | length 308
  L4_Signal w7: J5.33 -600.39,-1620 -531.21,-1620 -494.41,-1583.2 U4.3@-494.41,-1512.11
SRC_CTRL_EN: J5.15 U1.2 | length 452.5
  L4_Signal w7: J5.15 265.61,-1654 491,-1654 533.68,-1611.32 533.68,-1559.66 U1.2
SRC_D/C: J5.40 U5.2 | length 2361.1
  L1_Signal w7: J5.40 -884.94,-1899 225,-1899 270,-1854 270,-1649.61 349.61,-1570 1017.5,-1570 v1(1034.25,-1553.25)
  L4_Signal w7: v1(1034.25,-1553.25) 1034.59,-1552.91 1034.59,-1512.45 U5.2
SRC_DS_MOSI: J5.37 U2.2 | length 2988.7
  L4_Signal w7: J5.37 -930,-1749.61 -930,-1830 -875,-1885 1500,-1885 1536.18,-1848.82 U2.2
SRC_DS_SCK: J5.13 U2.4 | length 1701.4
  L4_Signal w7: J5.13 307.23,-1701.77 270,-1739 270,-1829 296,-1855 1450,-1855 1485,-1820 U2.4
SRC_HRBT: J5.07 U5.3 | length 513.2
  L4_Signal w7: J5.07 665.61,-1654 941,-1654 1009.34,-1585.66 U5.3
SRC_MD_MISO: J5.21 U1.5 | length 650.4
  L4_Signal w7: J5.21 34.61,-1585 440,-1585 456.91,-1568.09 U1.5
SRC_MD_MOSI: J5.19 U1.3 | length 618.5
  L4_Signal w7: J5.19 89.61,-1630 475,-1630 508.09,-1596.91 508.09,-1559.66 U1.3
SRC_MD_RESET: J5.32 U4.10 | length 587.1
  L1_Signal w7: v1(-590,-1439) -590,-1470 -535,-1525 -535,-1754.61 J5.32
  L4_Signal w7: v1(-590,-1439) -590,-1359 -545,-1314 -545,-1276.48 U4.10@-545.59,-1275.89
SRC_MD_SCK: J5.23 U1.4 | length 855.4
  L4_Signal w7: J5.23 -129.94,-1754 -50,-1754 -31.24,-1735.24 -31.24,-1686.24 47.5,-1607.5 460,-1607.5 ; 460,-1605 482.5,-1582.5 U1.4
SRC_MUX_SEL_0: J5.36 U4.2 | length 489.4
  L4_Signal w7: J5.36 -734.39,-1754 -670,-1754 -630,-1714 -630,-1685 -585,-1640 -530,-1640 -468.82,-1578.82 U4.2@-468.82,-1512.11
SRC_MUX_SEL_1: J5.35 U4.4 | length 382.6
  L4_Signal w7: J5.35 -782.17,-1692.17 -695,-1605 -551,-1605 -520,-1574 U4.4@-520,-1512.11
SRC_RESET: J5.22 R22.1 | length 2913.6
  L1_Signal w7: v1(-815,-1245) -815,-1275 -732,-1358 -732,-1828 -706,-1854 -134.39,-1854 -91.56,-1811.17 -82.17,-1811.17 J5.22
  L4_Signal w7: v1(-815,-1245) -815,-609 -741,-535 R22.1
SRC_RX: J5.10 U5.5 | length 661.1
  L4_Signal w7: J5.10 559.86,-1759.75 559.86,-1639.14 584,-1615 906.69,-1615 958.16,-1563.54 U5.5
SRC_TFT_CS: J5.16 U2.3 | length 1681.5
  L4_Signal w7: J5.16 217.83,-1841.83 246,-1870 1475,-1870 1510.59,-1834.41 U2.3
SRC_TX: J5.08 U5.4 | length 661.2
  L4_Signal w7: J5.08 575,-1758.94 575,-1670 610,-1635 925,-1635 983.75,-1576.25 U5.4
SW_A: C2.2 J5.12 R1.2 S1.3 | length 3136
  L1_Signal w7: J5.12 495.06,-1879 1553.79,-1879 1642.9,-1789.89 v1(1642.9,-1757.1) ; S1.3 1533.43,-356.44 1486.5,-403.37 1486.5,-676.5 1462.19,-700.81 R1.2 C2.2 1370,-724 v1(1660,-1014)
  L4_Signal w7: v1(1642.9,-1757.1) 1675.68,-1757.1 1740,-1692.79 1740,-1094 v1(1660,-1014)
SW_B: C3.2 J5.38 R2.2 S2.3 | length 3658.8
  L1_Signal w7: v1(-870,-660) -870,-619 -445,-194 C3.2 R2.2 1290,-194 1322.8,-226.8 S2.3
  L4_Signal w7: J5.38 -830,-1749.61 -830,-1485 -870,-1445 v1(-870,-660)
SW_C: C10.2 J5.11 R3.2 S3.3 | length 3239.3
  L1_Signal w7: J5.11 379.37,-1740.24 379.37,-1838.37 440,-1899 1555,-1899 1661.29,-1792.71 1661.29,-1779.71 v1(1663.4,-1777.6) ; v1(1620,-747.28) C10.2 1678.82,-700.81 R3.2 1680,-309 1706.73,-282.27 S3.3
  L4_Signal w7: v1(1620,-747.28) 1620,-939 1765,-1084 1765,-1696.78 1684.67,-1777.1 1663.9,-1777.1 v1(1663.4,-1777.6)
pads on no net: J1.2 J1.6 J2.0 J3.P1 J3.P2 J5.03 J5.05 J5.27 J5.28 S1.2 S1.4 S2.2 S2.4 S3.2 S3.4 S4. S4.1 U1.6 U1.9 U2.5 U2.6 U2.9 U2.10 U3.6 U3.9 U4.6 U4.9 U5.6 U5.9

## Polygon pours and split planes (outlines as drawn)
JETSON_GND on L2_PWR "JETSON_GND_L02_P200" (solid, remove dead copper, pour order 200): -1305,-1936 1805,-1936 1805,-1934 1805,-80 1805.07,-79.82 1135,195 0,193.14 0,0 -1305,0
JETSON_3V3 on L2_PWR "L2_PWR-JETSON_3V3" (solid, remove dead copper, pour order 198): -1305,-1934 1805,-1934 1805,193.14 1175,193.79 1175,-159.61 1319.61,-159.61 1370,-210 1370,-330 1290,-330 1290,-240 1270,-220 685.71,-220 687.31,-434.31 1050.85,-433.36 1050.85,-950 1145,-950 1145,-459 1354.25,-459 1354.25,-924 1530,-924 1548.98,-942.98 1548.98,-1332 1548.98,-1630 1165.12,-1630 1165.12,-1489 1145,-1468.88 1145,-1320 1212,-1320 1211,-1319 -18.75,-1319 -18.75,-1215 -1305,-1215
JETSON_GND on L1_Signal "JETSON_GND_L01_P190" (solid, remove dead copper, pour order 190): -1305,-1936 1805,-1936 1805,-1934 1805,-80 1805.07,-79.82 1135,195 0,193.14 0,0 -1305,0
JETSON_GND on L4_Signal "JETSON_GND_L04_P191" (solid, remove dead copper, pour order 191): -1305,-1935.59 1805,-1935.59 1805,-1933.59 1805,-79.59 1805.07,-79.41 1135,195.41 0,193.54 0,0.41 -1305,0.41
JETSON_GND on L3_GND "JETSON_GND_L03_P193" (solid, remove dead copper, pour order 193): -1305,-1936 1805,-1936 1805,-1934 1805,-80 1805.07,-79.82 1135,195 0,193.14 0,0 -1305,0

## Keep-outs
Keep-Out Layer:
  circle w118.11: c1251,39 r59.06
  circle w40: c-1174,-1752 r39.37
  circle w40: c1110,-1752 r39.37
  circle w20: c-669,-1132 r98.43
  circle w20: c-669,-218 r98.43
  lines w50: 1805,-1936.54 -1305,-1936.54 -1305,-39.37 0,-39.37 0,192.6 1135,194.46 1805.07,-80.36 ; 1805,-1934.54 1805,-80.54

## Silkscreen, mask and mechanical layers (free items; w line width, h text height)
Top Overlay:
  drawing of 16 lines, arcs and shapes, not listed
  text "UI-V1.2 / UBC Thunderbots /  / Designers: / Kenny Wakaba / Matthew Tong / Henry Rovner / Ryan Nguyen /  / 11/8/2022" at 140,-815 h30
  text "MUX0" at 1078.32,-973.41 h30
  text "CS0" at 1108.31,-1032.47 h30
  text "CS1" at 1118.31,-1091.52 h30
  text "CS2" at 1108.31,-1150.58 h30
  text "CS3" at 1108.31,-1209.63 h30
  text "CS4" at 1108.31,-1268.69 h30
  text "MUX1" at 1088.32,-1327.74 h30
  text "SCK" at 1023.32,-1386.8 h30
  text "MISO" at 1023.32,-1442.52 h30
  text "MOSI" at 1023.32,-1504.91 h30
  text "GND" at 20,-1522.59 h20
  text "EN" at 1136.95,-1563.96 h30
  text "RST" at 1108.31,-1623.02 h30
  text "GND" at -965,-1663.54 h20 r90
  text "DS_MOSI" at -865,-1663.54 h20 r90
  text "MUX1" at -765,-1663.54 h20 r90
  text "MISO" at -65,-1663.54 h20 r90
  text "MOSI" at 35,-1663.54 h20 r90
  text "DS_SCK" at 335,-1663.54 h20 r90
  text "SW_C" at 435,-1663.54 h20 r90
  text "HRBT" at 635,-1663.54 h20 r90
  text "CS4" at -665,-1668.54 h20 r90
  text "CS3" at -565,-1668.54 h20 r90
  text "CS2" at -465,-1668.54 h20 r90
  text "GND" at -265,-1668.54 h20 r90
  text "SCK" at -165,-1668.54 h20 r90
  text "3V3" at 135,-1668.54 h20 r90
  text "EN" at 235,-1668.54 h20 r90
  text "GND" at 535,-1668.54 h20 r90
  text "3V3" at 935,-1668.54 h20 r90
  text "GND" at 1265,-1678.74 h30
  text "3V3" at 1265,-1796.85 h30
  text "MD_RST" at -644.81,-1890 h20
  text "PB_RST" at -144.81,-1890 h20
  text "DS_CS" at 165.18,-1890 h20
  text "D/C" at -966.17,-1900.32 h20 r90
  text "GND" at -666.17,-1900.32 h20 r90
  text "GND" at -466.17,-1900.32 h20 r90
  text "CS1" at -266.17,-1900.32 h20 r90
  text "CS0" at -166.17,-1900.32 h20 r90
  text "GND" at 33.83,-1900.32 h20 r90
  text "GND" at 333.83,-1900.32 h20 r90
  text "RX" at 533.83,-1900.32 h20 r90
  text "TX" at 633.83,-1900.32 h20 r90
  text "GND" at 733.83,-1900.32 h20 r90
  text "5V" at 833.83,-1900.32 h20 r90
  text "5V" at 933.83,-1900.32 h20 r90
  text "SW_B" at -866.17,-1920.31 h20 r90
  text "MUX0" at -766.17,-1920.31 h20 r90
  text "BOOT" at 133.83,-1920.31 h20 r90
  text "SW_A" at 433.83,-1920.31 h20 r90
Bottom Overlay:
  drawing of 16 lines, arcs and shapes, not listed
  text "RESET" at 1386,-221 h20
  text "BOOT" at 1386,-260 h20
  text "3V3" at 1386,-299 h20
  text "HB" at 1386,-338 h20
  text "TX" at 1386,-377 h20
  text "RX" at 1386,-416 h20
  text "GND" at 1386,-455 h20
  text "UI-V1.2 / UBC Thunderbots /  / Designer: / Kenny Wakaba / Matthew Tong / Henry Rovner / Ryan Nguyen /  / 11/8/2022" at -595,-970 h30
Mechanical 1:
  lines w7: 1805,-1936 -1305,-1936 -1305,-39.37 0,-39.37 0,193.14 1135,195 1805.07,-79.82 ; 1805,-1934 1805,-80
Drill Drawing:
  drawing of 312 lines, arcs and shapes, not listed
  text "Layer" at 2214.65,1212 h60
  text "Name" at 2474.5,1212 h60
  text "Material" at 2989.5,1212 h60
  text "Thickness" at 3450,1212 h60
  text "Constant" at 3828.75,1212 h60
  text "Board Layer Stack" at 4178.2,1212 h60
  text "Top Overlay" at 2474.5,1092 h60
  text "Top Mask" at 2474.5,972 h60
  text "Solder Resist" at 2989.5,972 h60
  text "0.59mil" at 3450,972 h60
  text "3.8" at 3828.75,972 h60
  text "1" at 2214.65,852 h60
  text "L1_Signal" at 2474.5,852 h60
  text "1.38mil" at 3450,852 h60
  text "Dielectric 1" at 2474.5,732 h60
  text "2313" at 2989.5,732 h60
  text "3.94mil" at 3450,732 h60
  text "4.05" at 3828.75,732 h60
  text "2" at 2214.65,612 h60
  text "L2_PWR" at 2474.5,612 h60
  text "0.69mil" at 3450,612 h60
  text "Core" at 2474.5,492 h60
  text "FR-4" at 2989.5,492 h60
  text "49.80mil" at 3450,492 h60
  text "4.5" at 3828.75,492 h60
  text "3" at 2214.65,372 h60
  text "L3_GND" at 2474.5,372 h60
  text "0.69mil" at 3450,372 h60
  text "Dielectric 2" at 2474.5,252 h60
  text "2313" at 2989.5,252 h60
  text "3.94mil" at 3450,252 h60
  text "4.05" at 3828.75,252 h60
  text "4" at 2214.65,132 h60
  text "L4_Signal" at 2474.5,132 h60
  text "1.38mil" at 3450,132 h60
  text "Bottom Mask" at 2474.5,12 h60
  text "Solder Resist" at 2989.5,12 h60
  text "0.59mil" at 3450,12 h60
  text "3.8" at 3828.75,12 h60
  text "Bottom Overlay" at 2474.5,-108 h60
  text "Symbol" at 2227.2,-389.15 h72
  text "Count" at 2527.86,-389.15 h72
  text "Hole Size" at 2829.26,-389.15 h72
  text "Plated" at 3419.11,-389.15 h72
  text "Hole Type" at 3678.31,-389.15 h72
  text "Hole Tolerance (+)" at 4053.55,-389.15 h72
  text "Hole Tolerance (-)" at 4680.43,-389.15 h72
  text "637" at 2527.86,-513.65 h60
  text "8.00mil (0.203mm)" at 2829.26,-513.65 h60
  text "PTH" at 3419.11,-513.65 h60
  text "Round" at 3678.31,-513.65 h60
  text "52" at 2527.86,-638.15 h60
  text "8.00mil (0.203mm)" at 2829.26,-638.15 h60
  text "PTH" at 3419.11,-638.15 h60
  text "Round" at 3678.31,-638.15 h60
  text "5.12mil (0.130mm)" at 4053.55,-638.15 h60
  text "3.15mil (0.080mm)" at 4680.43,-638.15 h60
  text "12" at 2527.86,-762.65 h60
  text "25.00mil (0.635mm)" at 2829.26,-762.65 h60
  text "PTH" at 3419.11,-762.65 h60
  text "Round" at 3678.31,-762.65 h60
  text "5.12mil (0.130mm)" at 4053.55,-762.65 h60
  text "3.15mil (0.080mm)" at 4680.43,-762.65 h60
  text "9" at 2527.86,-887.15 h60
  text "35.00mil (0.889mm)" at 2829.26,-887.15 h60
  text "PTH" at 3419.11,-887.15 h60
  text "Round" at 3678.31,-887.15 h60
  text "5.12mil (0.130mm)" at 4053.55,-887.15 h60
  text "3.15mil (0.080mm)" at 4680.43,-887.15 h60
  text "1" at 2527.86,-1011.65 h60
  text "37.99mil (0.965mm)" at 2829.26,-1011.65 h60
  text "PTH" at 3419.11,-1011.65 h60
  text "Round" at 3678.31,-1011.65 h60
  text "7.87mil (0.200mm)" at 4053.55,-1011.65 h60
  text "7.87mil (0.200mm)" at 4680.43,-1011.65 h60
  text "2" at 2527.86,-1136.15 h60
  text "39.37mil (1.000mm)" at 2829.26,-1136.15 h60
  text "NPTH" at 3419.11,-1136.15 h60
  text "Round" at 3678.31,-1136.15 h60
  text "7.87mil (0.200mm)" at 4053.55,-1136.15 h60
  text "7.87mil (0.200mm)" at 4680.43,-1136.15 h60
  text "2" at 2527.86,-1260.65 h60
  text "39.37mil (1.000mm)" at 2829.26,-1260.65 h60
  text "PTH" at 3419.11,-1260.65 h60
  text "Round" at 3678.31,-1260.65 h60
  text "5.12mil (0.130mm)" at 4053.55,-1260.65 h60
  text "3.15mil (0.080mm)" at 4680.43,-1260.65 h60
  text "40" at 2527.86,-1385.15 h60
  text "40.16mil (1.020mm)" at 2829.26,-1385.15 h60
  text "PTH" at 3419.11,-1385.15 h60
  text "Round" at 3678.31,-1385.15 h60
  text "5.12mil (0.130mm)" at 4053.55,-1385.15 h60
  text "3.15mil (0.080mm)" at 4680.43,-1385.15 h60
  text "2" at 2527.86,-1509.65 h60
  text "78.74mil (2.000mm)" at 2829.26,-1509.65 h60
  text "NPTH" at 3419.11,-1509.65 h60
  text "Round" at 3678.31,-1509.65 h60
  text "7.87mil (0.200mm)" at 4053.55,-1509.65 h60
  text "7.87mil (0.200mm)" at 4680.43,-1509.65 h60
  text "1" at 2527.86,-1634.15 h60
  text "118.11mil (3.000mm)" at 2829.26,-1634.15 h60
  text "NPTH" at 3419.11,-1634.15 h60
  text "Round" at 3678.31,-1634.15 h60
  text "7.87mil (0.200mm)" at 4053.55,-1634.15 h60
  text "7.87mil (0.200mm)" at 4680.43,-1634.15 h60
  text "2" at 2527.86,-1758.65 h60
  text "196.85mil (5.000mm)" at 2829.26,-1758.65 h60
  text "NPTH" at 3419.11,-1758.65 h60
  text "Round" at 3678.31,-1758.65 h60
  text "7.87mil (0.200mm)" at 4053.55,-1758.65 h60
  text "7.87mil (0.200mm)" at 4680.43,-1758.65 h60
  text "760 Total" at 2527.86,-1883.15 h60